# Altium PCB morpheus_pill_bqle_ASSY.PcbDoc (part 2 of 2)
Units mil, origin at the board's own origin, x right, y up, seen from the top; angles counter-clockwise.
Board outline 944.59 x 944.86 mil, 4 copper layers (TOP, COM, SIG, BOT), stack 33.6 mil thick; 116 components, 86 nets, 384 pads, 167 vias.
Unrouted connection lines stored in the file: 4.
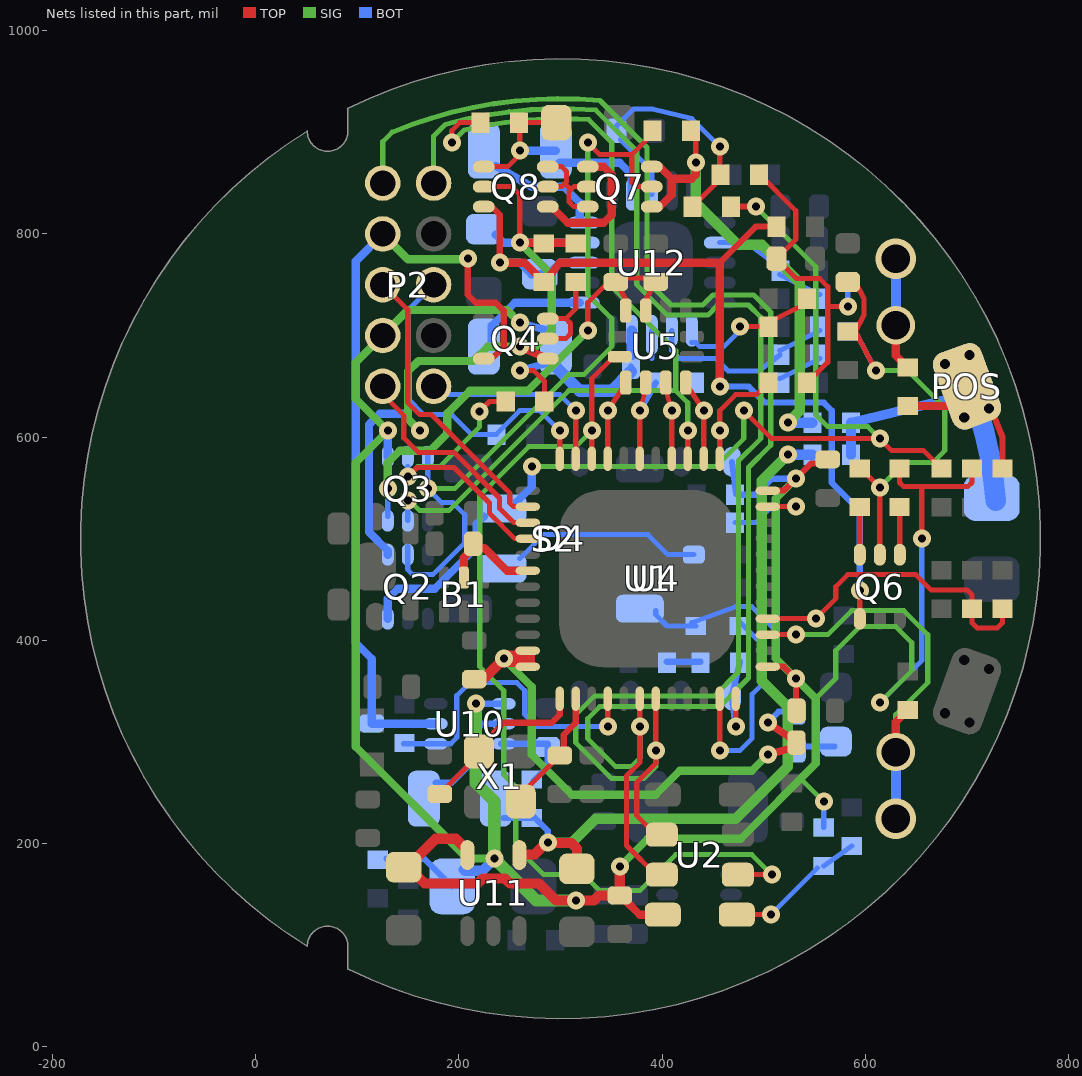
[diagram p4: the nets of this part, all layers, seen from the top]

## Via types
v1: diameter 17.72, hole 7.87, TOP to BOT, 158 vias
v2: diameter 17.72, hole 7.87, TOP to BOT, tented both sides, 5 vias
v3: diameter 22, hole 12, TOP to BOT, 2 vias
v4: diameter 40, hole 28, TOP to BOT, 2 vias

## Nets (pads, with @x,y where several pads share a name; then routed paths per layer and width w, separated by ;. In a path a pad name is that pad's centre, name@x,y a point inside that pad or via, vN(x,y) a via of type N, cw(c..) or ccw(c..) an arc to the next point about the centre after c; other vN are vias at no path point) (continued)
IMU_EN: Q3.5 R18.1 U1.28 | length 302.3
  TOP w5: v2(149.61,561.02) 158.58,570 195.08,570 230,535.08 230,525 255,500 U1.28@267.52,500 ; v1(220,625) 230,635 R18.1@246,635
  SIG w5: v2(149.61,561.02) 159.45,570.87 181.1,570.87 220,609.76 v1(220,625)
  BOT w5: v2(149.61,561.02) Q3.5@149.61,570.87
IMU_MISO: U1.17 U5.3 | length 75.9
  TOP w5: U5.3@401.57,653.54 v1(409.45,625.98) U1.17@409.45,578.74
IMU_MOSI: U1.15 U5.4 | length 75.6
  TOP w5: U5.4@425.2,649.61 v1(440.94,625.98) U1.15@440.94,578.74
IMU_SCLK: U1.21 U5.1 | length 75.6
  TOP w5: U1.21@346.46,578.74 v1(346.46,625.98) U5.1@362.2,649.61
INT: U1.22 U2.2 U5.12 | length 935.2
  TOP w5: U1.22@330.71,578.74 v1(330.71,606.3) 330.71,657.48 U5.12@354.33,681.1 ; U2.2@474.41,169.29 v1(507.87,169.29)
  SIG w5: v1(330.71,606.3) 314.96,590.55 268.7,590.55 220.47,542.32 220.47,374.02 244.09,350.39 244.09,267.72 255.91,255.91 255.91,196.85 283.46,169.29 322.83,169.29 338.58,153.54 377.95,153.54 413.39,188.98 488.19,188.98 v1(507.87,169.29)
LED1: R63.1 U1.11 | length 94
  TOP w5: U1.11@503.74,531.5 v1(531.5,531.5)
  BOT w5: R63.1@471.76,515.75 492.13,515.75 507.87,531.5 v1(531.5,531.5)
LED2: R62.1 U1.47 | length 217.1
  TOP w5: v1(456.69,291.34) U1.47@456.69,342.52
  BOT w5: v1(456.69,291.34) 476.38,291.34 488.6,303.56 488.6,346.87 500,358.27 500,394.39 R62.1@476.38,418.01
LED3: R33.2 R61.1 S1.2 S2.3 U1.3 | length 581.6
  TOP w5: U1.3@503.74,405.51 v1(531.5,405.51)
  TOP w7.99: S1.2@629.92,290 629.92,319.58 R33.2@641.73,331.39
  SIG w5: v1(531.5,405.51) 562.99,405.51 586.61,429.13 637.8,429.13 661.42,405.51 661.42,358.27 629.92,326.77 S1.2@629.92,290
  BOT w5: S2.3@393.7,429.13 393.7,425.2 404.83,414.07 R61.1@433.07,414.07 ; R61.1@429.13,417.32 472.44,433.07 488.19,433.07 515.75,405.51 v1(531.5,405.51)
  BOT w10: v4@630,225 S1.2@630,290
  other v4: 629.92,224.41
MODE: R17.1 U1.40 U10.4 | length 309.2
  TOP w5: v1(346.46,314.96) U1.40@346.46,342.52
  BOT w5: R17.1@145.67,298.19 191.89,298.19 197.83,304.13 197.83,345.47 210.63,358.27 256.89,358.27 264.76,350.39 264.76,326.77 276.57,314.96 v1(346.46,314.96)
NetC37_2: C37.2 Q6.2 R32.2 R37.2 R39.1 | length 449.2
  TOP w5: R32.2@589.11,701.91 598.66,720.35 ; R32.2@589.11,706.16 v1(610.24,665.35) ; C37.2@589.11,754.78 598.66,736.34 598.66,720.59 ; R39.1@594.49,566.24 R39.1@598.43,570.18 ; R39.1@594.49,570.18 v1(614.17,550.5) Q6.2@614.17,488.17
  SIG w5: v1(610.24,665.35) 641.73,665.35 678.15,628.94 678.15,586.61 666.34,574.8 638.48,574.8 v1(614.17,550.5)
  BOT w5: R37.2@589.11,706.16 v1(610.24,665.35)
NetC66_2: C66.2 R66.2 R67.1 R68.2 | length 313.6
  TOP w5: R67.1@495.72,858.61 531.5,822.83 531.5,794.59 C66.2@512.5,775.59 532.18,755.91 555.12,755.91 562.99,748.03 562.99,673.23 ; R66.2@542.62,653.54 562.31,673.23 ; 562.99,728.35 v1(582.68,728.35)
  BOT w5: v1@582.68,729.03 R68.2@582.68,752.65
NetD1_2: D1.2 D4.1 | length 189.2
  BOT w5: D4.1@259.84,480.32 283.46,503.94 385.83,503.94 405.51,484.25 D1.2@431.1,484.25
NetL3_1: L3.1 U12.20 | length 114.2
  BOT w8: L3.1@236.25,866.69 271.65,846.46 303.15,846.46 318.9,830.71 U12.20@318.9,811.02
NetL4_2: L4.2 U12.16 | length 118.3
  BOT w8: L4.2@236.22,688.98 232.28,692.91 232.28,709.65 254.92,732.28 U12.16@318.9,732.28
NetL5_2: L5.2 L6.1 | length 38.3
  BOT w5.98: L5.2@531.5,295.28 L6.1@569.77,295.28
NetL7_1: L7.1 U10.2 | length 104.5
  BOT w6: L7.1@177.17,259.84 192.91,259.84 216.54,283.46 216.54,311.02 223.39,317.87 U10.2@241.5,317.87
NetQ4_5: Q4.5 Q4.6 R21.1 | length 99.2
  TOP w5: Q4.5@287.4,696.85 305.08,696.85 309.84,701.61 309.84,711.77 305.08,716.54 ; Q4.6@287.4,716.54 305.08,716.54 ; R21.1@314.96,752.65 314.96,726.42 305.08,716.54
NetQ6_1: Q6.1 R38.1 | length 42.8
  TOP w5: Q6.1@633.86,488.17 R38.1@633.86,531
NetQ6_3: Q6.3 R39.2 | length 40.1
  TOP w5: Q6.3@594.49,488.17 R39.2@594.49,528.24
NetQ7_1: Q7.1 Q8.4 | length 135.1
  TOP w7.99: Q8.4@291.34,826.77 307.09,811.02 342.52,811.02 350.39,818.9 350.39,858.27 342.52,866.14 Q7.1@326.77,866.14
NetQ7_2: Q7.2 Q7.3 Q8.5 Q8.6 | length 122.4
  TOP w5: Q8.5@287.4,846.46 301.14,846.46 305.91,851.22 305.91,861.38 301.14,866.14 Q8.6@287.4,866.14 ; 305,848 310,844 ; Q7.2@326.77,846.46 313.03,846.46 308.27,841.69 308.27,831.54 313.03,826.77 ; 313.03,826.77 Q7.3@326.77,826.77 313.03,826.77
NetR47_1: R47.1 R48.2 | length 44
  BOT w5: R48.2@515.75,657.48 R47.1@555.12,677.17
NFLASH_CS: R13.1 U1.48 U4.1 | length 93.5
  TOP w5: v1(472.44,314.96) U1.48@472.44,342.52
  BOT w6: U4.1@468.5,346.46 v1(472.44,314.96) ; U4.1@468.7,345.63 R13.1@476.57,378.9
NIMU_CS: R28.1 U1.19 U5.2 | length 107.6
  TOP w5: U1.19@377.95,578.74 v1(377.95,625.98) U5.2@385.83,653.54
  BOT w6: v1(377.95,625.98) R28.1@393.7,653.54
OE: R2.1 R3.2 U2.1 | length 132.1
  TOP w5: U2.1@473.43,129.92 v1(506.89,129.92)
  BOT w5: v1(506.89,129.92) R2.1@552.66,175.69 ; R2.1@559.06,177.85 R3.2@586.61,197.54
OV: R44.1 R45.2 U12.7 | length 110.3
  BOT w5: U12.7@456.69,791.34 483.57,791.34 R45.2@515.06,767.72 ; R45.2@515.75,759.84 R44.1@555.12,740.16
PROG: R41.1 R42.2 U12.11 | length 132.5
  TOP w5: v1(476.38,708.66) R42.2@503.94,708.66 ; R42.2@503.94,712.6 R41.1@543.31,732.28
  BOT w5: U12.11@429.13,692.91 433.07,692.91 437.01,688.98 460.63,688.98 v1@480.32,708.66
RGB_DIS: Q2.5 Q3.6 Q7.5 R20.1 | length 780.6
  TOP w5: v1(326.77,889.76) 338.58,877.95 370.08,877.95 ; Q7.5@389.76,846.46 374.02,846.46 370.08,850.39 370.08,877.95 ; R20.1@394.39,901.57 393.7,901.57 370.08,877.95
  SIG w5: v2(169.29,549.21) 195.87,549.21 308.07,661.42 322.83,661.42 350.39,688.98 350.39,716.54 326.77,740.16 v1(326.77,889.76)
  BOT w5: Q2.5@149.61,492.13 Q2.5@149.61,484.25 149.61,469.49 154.53,464.57 174.21,464.57 205.71,496.06 205.71,523.62 193.9,535.43 183.07,535.43 v2(169.29,549.21) Q3.6@169.29,580.71
RGB_EN: Q3.2 R65.2 U1.16 | length 895.6
  TOP w5: v1(192.91,889.76) 192.91,901.57 200.79,909.45 R65.2@221.16,909.45 ; U1.16@425.2,578.74 v1(425.2,606.3)
  SIG w5: v2@149.61,539.37 161.42,527.56 189.96,527.56 308.07,645.67 413.39,645.67 ; v1(192.91,889.76) 205.54,902.39 ; 205.49,902.44 cw(c300,500) 327.76,912.45 ; 327.73,912.42 350.39,889.76 350.39,748.03 413.39,685.04 413.39,645.67 ; v1(425.2,606.3) 425.2,633.86 413.39,645.67
  BOT w5: Q3.2@149.61,517.72 v2(149.61,537.4)
RXD: P2.5 U1.26 | length 292.5
  TOP w5: P2.5@125,750 149.61,725.39 149.61,633.86 161.42,622.05 172.95,622.05 250,545 250,535 253.5,531.5 U1.26@267.52,531.5
SCL: P2.10 U1.43 U2.6 | length 1371
  TOP w5: U2.6@393.7,208.66 375,227.36 375,260 393.7,278.7 v1(393.7,291.34) U1.43@393.7,342.52
  SIG w5: P2.10@175,850 175,896.15 186.61,907.75 cw(c300,500) 334.69,921.8 375,881.49 375,750 405,720 445,720 455,730 485,730 497.05,717.95 497.05,598.43 475,576.38 475,368.7 451.3,345 333.19,345 314.96,326.77 314.96,299.21 350.39,263.78 381.89,263.78 393.7,275.59 v1(393.7,291.34)
SDA: P2.9 U1.42 U2.7 | length 1455.2
  TOP w5: U1.42@377.95,342.52 377.95,279.53 365,266.57 365,197.99 U2.7@394.69,168.31
  SIG w5: P2.9@125,850 125,890.83 134.29,900.11 cw(c300,500) 338.78,931.33 385,885.11 385,753.58 408.58,730 440,730 450,740 490,740 506.89,723.11 506.89,591.89 485,570 485,362.95 457.05,335 338.58,335 ; 338.58,334.65 326.77,322.83 326.77,303.15 354.33,275.59 369.72,275.59 377.95,283.82 v1(377.95,314.96)
STATUS: U12.13 | length 27.6
  BOT w5: 389.76,677.17 U12.13@389.76,704.72
SW: R34.1 S1.1 | length 111.3
  TOP w7.99: S1.1@629.92,710 629.92,680.42 R34.1@641.73,668.61
  BOT w10: S1.1@630,710 v4@630,775
  other v4: 629.92,775.59
SWDCLK: P2.6 R1.2 U1.24 | length 332.4
  TOP w5: U1.24@299.21,578.74 v1(299.21,606.3)
  BOT w5: P2.6@175,750 150,725 150,637.4 165.35,622.05 192.91,622.05 212.6,602.36 R1.2@236.91,602.36 ; R1.2@236.56,602.7 259.84,625.98 279.53,625.98 v1(299.21,606.3)
SWDIO: P2.2 U1.23 | length 192.1
  TOP w5: U1.23@314.96,578.74 v1@314.96,622.76
  BOT w5: P2.2@175,645.67 178.94,641.73 299.21,641.73 v1(314.96,625.98)
TRIM: R66.1 U1.14 | length 106.6
  TOP w5: U1.14@456.69,578.74 v1(456.69,606.3) 456.69,625.98 472.44,641.73 492.81,641.73 R66.1@504.62,653.54
TXD: P2.1 U1.27 | length 219.3
  TOP w5: P2.1@121.06,646.06 145.67,621.46 145.67,599.33 160,585 195,585 240,540 240,530 254.25,515.75 U1.27@267.52,515.75
VAUX: C23.2 P2.7 Q4.3 U10.5 | length 789.5
  TOP w6: v1(208.66,775.59) 208.66,740.16 216.54,732.28 236.22,732.28 244.09,724.41 244.09,689.09 232.17,677.17 Q4.3@224.41,677.17
  SIG w8: P2.7@125,800 150,775 v1@204.72,775
  BOT w8: 98.43,773.43 98.43,397.64 114.17,381.89 C23.2@114.17,318.21 ; 99.51,774.51 P2.7@125,800 ; C23.2@114.17,317.87 U10.5@178.5,317.87
VBAT: C22.2 POS.1 R23.2 R26.1 R27.1 R34.2 | length 372.3
  TOP w6: POS.1@725,625 735,600 R23.2@735,569
  TOP w7.99: R34.2@641.73,630.61 POS.1@688.98,630.61
  BOT w10: R27.1@585.93,582.68 R26.1@585.93,614.17 POS.1@700.1,641.73 ; POS.1@681.1,645.67 POS.1@685.04,641.73
  BOT w20: POS.1@704.07,647.07 cw(c300,500) C22.2@728.36,537.48
VBYS: Q7.4 Q7.6 R20.2 R26.2 | length 470.9
  TOP w5: v1(433.07,870.08) R20.2@433.07,897.64
  TOP w7.99: Q7.4@389.76,826.77 397.64,826.77 409.45,838.58 409.45,854.33 ; Q7.6@389.76,866.14 397.64,866.14 409.45,854.33 ; v1(433.07,870.08) 433.07,858.27 429.13,854.33 409.45,854.33
  SIG w10: v1(433.07,870.08) 433.07,830.71 474.41,789.37 498.03,789.37 535.43,751.97 535.43,625.98 v1(523.62,614.17)
  BOT w10: v1(523.62,614.17) R26.2@547.93,614.17
VBYT: C63.2 Q6.4 Q8.3 R31.1 R35.2 U12.18 | length 896.6
  TOP w5: Q6.4@594.49,421.26 v1(594.49,448.82)
  TOP w5.98: 456.69,771.65 492.13,807.09 R35.2@512.5,807.09
  TOP w6: Q8.3@232.28,826.77 240.16,818.9 v1(240.16,771.65)
  TOP w7.99: v1(240.16,771.65) 264.46,771.65 R31.1@283.46,752.65 ; R31.1@287.4,755.91 299.21,771.65 452.76,771.65 ; v1(456.69,649.61) 456.69,771.65
  BOT w5.98: v1(456.69,649.61) 485.39,649.61 501.14,633.86 559.06,633.86 566.93,625.98 566.93,555.12 594.49,527.56 v1(594.49,448.82)
  BOT w8: v1(240.16,771.65) 259.84,771.65 271.16,760.34 C63.2@272.15,760.34 ; C63.2@279.53,760.34 287.9,760.34 299.21,771.65 U12.18@323.33,771.65
VDD: C6.2 C13.2 L5.1 U1.35 U1.36 | length 534.4
  TOP w6: U1.35@257.87,389.76 U1.35@267.52,389.76 ; U1.36@271.65,374.02 U1.35@271.65,389.76
  TOP w8: v1(503.94,287.4) C13.2@531.5,295.28 ; v1(503.94,318.9) C13.2@527.56,303.15
  TOP w10: C6.2@223.98,361.77 v1(244.09,381.89)
  TOP w16: v1(244.09,381.89) 264.76,381.89
  SIG w8: v1(244.09,381.89) 271.65,354.33 271.65,287.4 311.02,248.03 393.7,248.03 417.32,271.65 488.19,271.65 v1(503.94,287.4)
  BOT w5.98: v1(503.94,318.9) 514.76,329.72 L5.1@531.5,329.72
VDD_PA: B1.5 C8.2 U1.30 | length 96.9
  TOP w7.99: B1.5@204.72,460.63 204.72,481.47 214,490.75 225,490.75 247.24,468.5 U1.30@267.72,468.5
VER_EN: R22.1 R30.1 U1.4 | length 309.7
  TOP w5: U1.4@503.74,421.26 v1(551.18,421.26) 570.87,440.94 570.87,452.76 582.68,464.57 649.61,464.57 664.47,449.7 700.08,449.7 705,444.78 R30.1@705,431 705,417.22 709.92,412.3 730.08,412.3 735,417.22 R22.1@735,431
VIMU: C19.2 C20.2 Q3.3 R28.2 U5.9 U5.10 | length 452.7
  TOP w5: v1(326.77,704.72) 326.77,732.28 C20.2@346.46,751.97 ; C20.2@354.03,753.99 U5.10@364.31,735.47 ; C20.2@354.33,756.59 C19.2@393.7,756.59 ; U5.9@383.72,735.47 C19.2@394,753.99
  SIG w8: v2(129.92,549.21) 129.92,574.8 141.73,586.61 171.61,586.61 188.43,603.43 188.43,623.43 210.67,645.67 267.72,645.67 v1(326.77,704.72)
  BOT w5: Q3.3@129.92,521.65 v2(129.92,549.21)
VIN: C61.2 L3.2 Q8.1 R65.1 U12.2 | length 231.9
  TOP w5: Q8.1@224.41,866.14 248.03,866.14 v1@263.78,881.89 ; v1(259.84,881.89) R65.1@259.84,909.45 ; 268.21,909.45 C61.2@295.77,909.45
  BOT w8: v1(259.84,881.89) L3.2@295.28,881.89 ; L3.2@299.21,870.08 358.27,870.08 370.08,858.27 U12.2@370.08,838.58
VMCU: C1.2 C2.2 C17.2 C18.2 C21.2 C64.2 L4.1 P2.3 Q3.4 R2.2 R13.2 R14.2 R15.2 R18.2 R29.2 R38.2 R54.2 U1.1 U1.12 U2.8 U4.8 U10.1 U11.5 U12.14 | length 3190.5
  TOP w5: v1(259.84,665.35) 273.58,665.35 284,654.94 R18.2@284,635 ; R38.2@633.58,569 633.58,555.39 637.8,551.18 700.79,551.18 705,555.39 R29.2@705,569 ; v1(655.51,500) 655.51,551.18
  TOP w5.98: U1.12@503.74,547.24 519.68,547.24 v1(531.5,559.06) 546.56,574.12 C1.2@562.31,574.12 ; U1.1@503.94,374.02 519.88,374.02 v1(531.69,362.2) C2.2@531.69,330.71
  TOP w7.99: C21.2@363.86,144.02 377.95,129.92 U2.8@400.59,129.92
  TOP w10: C17.2@153.66,181.42 153.86,181.42 177.17,204.72 196.85,204.72 208.27,193.31 U11.5@208.27,188.66 ; C17.2@157.6,177.48 157.6,169.17 166.02,160.75 218.62,160.75 223.54,165.67 245.2,165.67 250.12,160.75 278.66,160.75 295.39,144.02 332.99,144.02 337.9,148.92 C21.2@358.27,148.92 v1(358.27,177.17)
  SIG w5: 535.93,264.27 v1(559.06,241.14) ; 551.18,342.72 570.87,362.4 570.87,389.76 594.49,413.39 629.92,413.39 645.67,397.64 645.67,370.08 v1(614.17,338.58)
  SIG w8: v1@234.65,185.35 208.35,185.35 98.43,295.28 98.43,574.8 v1(129.92,606.3) 98.43,637.8 98.43,673.43 P2.3@125,700 150,725 247.44,725 v1(259.84,712.6) ; v1(358.27,177.17) 385.83,204.72 477.32,204.72 551.18,278.58 551.18,342.72 v1(531.69,362.2) 511.81,382.09 511.81,539.37 v1(531.5,559.06)
  SIG w12: v1@216.54,329.68 216.54,259.84 234.65,241.73 v1@234.65,185.35 ; v1(235,185) 275.98,144.02 v1(315.08,144.02)
  BOT w5: R2.2@559.06,215.85 v1(559.06,241.14) ; v1(614.17,338.58) 655.51,379.92 v1(655.51,500)
  BOT w5.98: C64.2@369.39,664.67 C64.2@369.39,669.29
  BOT w6: R54.2@128.64,185.41 129.06,185 165.83,185 C18.2@193.03,157.8 ; v1(216.54,337.56) U10.1@241.5,337.56 ; R14.2@404.53,378.94 R13.2@437.69,378.94 ; U4.8@468.7,575.63 R15.2@472.64,544.13 ; R15.2@475.69,543.31 492.13,543.31 507.87,559.06 v1(531.5,559.06)
  BOT w7.99: Q3.4@129.92,580.71 v1(129.92,606.3) ; v1(259.84,665.35) L4.1@287.68,673.23 ; v1(259.84,712.6) L4.1@287.68,704.72
  BOT w10: C18.2@204.49,174.53 205.79,173.23 223.23,173.23 v1(235,185) ; C64.2@370.08,681.1 U12.14@370.08,704.72
  BOT w12: L4.1@295.28,669.29 318.9,645.67 350.39,645.67 C64.2@369.39,664.67
VO: R46.1 R47.2 U12.12 | length 184.1
  BOT w5: U12.12@409.45,704.72 409.45,685.04 417.32,677.17 452.83,677.17 465,665 495,665 R47.2@516.1,681.1 ; R47.2@515.75,685.04 R46.1@555.12,704.72
VREF: C60.2 R60.1 R67.2 U12.3 | length 260.6
  TOP w5: R60.1@429.82,826.77 R67.2@458.06,855.02 ; R67.2@456.69,858.27 v1(456.69,885.83)
  BOT w5: C60.2@355.02,901.57 355.02,906.2 371.93,923.11 390.23,923.11 429.13,913.39 v1(456.69,885.83) ; C60.2@358.95,893.02 389.76,862.2 U12.3@389.76,838.58
VRGB: D4.2 Q2.3 R25.2 R60.2 | length 995
  TOP w5: v1(480.32,625.98) 507.87,598.43 v1(614.17,598.43) 625.98,586.61 657.39,586.61 R25.2@675,569
  TOP w5.98: R60.2@467.82,826.77 v1(492.13,826.77)
  SIG w5: v1(271.65,570.87) 452.76,570.87 480.32,598.43 v1(480.32,625.98) ; v1(492.13,826.77) 551.18,767.72 551.18,622.05 562.99,610.24 602.36,610.24 v1(614.17,598.43)
  BOT w7.99: D4.2@255.91,535.43 271.65,551.18 v1(271.65,570.87)
  BOT w8: Q2.3@129.92,421.26 129.92,440.94 139.76,450.79 176.18,450.79 217.52,492.13 217.52,514.76 D4.2@224.41,521.65
VSTOR: C62.2 Q2.4 Q4.4 Q8.2 R21.2 R31.2 U12.19 | length 778.9
  TOP w5: Q8.2@224.41,846.46 251.97,846.46 259.84,838.58 v1(259.84,791.34)
  TOP w7.99: v1@255.91,791.34 R31.2@283.46,791.34 ; v1(259.84,688.98) Q4.4@287.4,677.17 ; R31.2@287.4,791.34 R21.2@314.96,791.34
  SIG w8: v1(161.42,606.3) 150,617.72 150,665 160,675 214.37,675 228.35,688.98 v1(259.84,688.98) 275.59,688.98 291.34,704.72 291.34,759.84 v1(259.84,791.34)
  BOT w7.99: Q2.4@129.92,484.25 129.92,488.19 111.5,506.61 111.5,612.48 122.05,623.03 144.68,623.03 v1(161.42,606.3)
  BOT w8: C62.2@236.22,799.21 244.09,791.34 U12.19@322.83,791.34
VSYS: C24.2 L7.2 R16.2 R27.2 U11.4 | length 763.3
  TOP w10: U11.4@258.98,189.29 274.72,189.29 286.04,200.61 310.65,200.61 316.06,195.2 C24.2@316.06,175.02
  SIG w10: v1(287.4,200.79) 311.02,200.79 334.65,224.41 472.44,224.41 523.62,275.59 523.62,334.65 498.03,360.24 498.03,557.09 v1(523.62,582.68)
  BOT w6: L7.2@244.09,225.09 R16.2@271.65,225.09 ; R16.2@273.28,226.72 287.4,212.6 v1(287.4,200.79)
  BOT w10: v1(523.62,582.68) R27.2@547.93,582.68
VTPS: C16.2 R16.1 U10.3 | length 88.5
  BOT w6: U10.3@241.5,298.19 287.4,298.19 287.4,275.59 R16.1@273.28,261.47
XC1: C4.2 U1.37 X1.1 | length 143.2
  TOP w5: C4.2@181.1,248.72 X1.1@214.22,281.84
  TOP w6: X1.1@228.35,303.15 244.09,318.9 291.34,318.9 299.21,326.77 U1.37@299.21,342.52
XC2: C5.2 U1.38 X1.3 | length 107.5
  TOP w5: X1.3@266.09,253.59 C5.2@299.21,286.72
  TOP w6: C5.2@303.15,286.72 303.15,307.09 314.96,318.9 U1.38@314.96,342.52
pads on no net: C38.1 C38.2 Q2.1 Q2.2 Q2.6 R4.1 R4.2 R5.2 R6.1 R6.2 R68.1 S2.1 S2.2 S2.4 U2.3 U5.11 U11.3 U12.9 U12.17

## Polygon pours and split planes (outlines as drawn)
GND on COM (split plane): 153 vertices, not listed, extent 74.71,43.56 756.44,956.44

## Other copper
TOP:
  text "1" at 1000,330 h60 r90
SIG:
  text "3" at 1000,500 h60 r90
BOT:
  text "4" at 1000,605 h60 r90
COM (plane layer: these items are gaps in the copper):
  pour cut-out: 66.77,89.14 cw(c300,500) 66.69,910.81 66.93,910.81 66.93,263.78 66.77,263.78 78.74,263.78 cw(c78.74,244.09) 78.74,224.41 66.77,224.41
  lines w7.87: 66.77,224.41 78.74,224.41 ccw(c78.74,244.09) 78.74,263.78 66.77,263.78
  lines w15.75: 66.69,910.81 ccw(c300,500) 66.77,89.14 66.77,224.41 ; 66.93,263.78 66.93,910.81

## Silkscreen, mask and mechanical layers (free items; w line width, h text height)
Top Overlay:
  region: 46.44,470.37 7.12,470.37 cw(c7.12,483.46) -5.97,483.46 -5.97,509.68 cw(c7.13,509.68) 7.13,522.78 33.34,522.78 cw(c33.34,509.68) 46.44,509.68 46.44,470.37 39.79,496.57 cw(c20.24,496.57) 20.24,477.02 20.23,477.02 cw(c20.23,496.57) 0.68,496.57 cw(c20.23,496.57) 20.23,516.13 cw(c20.23,496.57) 39.79,496.57
  region: 20.23,509.67 20.23,483.48 ccw(c20.23,496.57) 33.33,496.57 ccw(c20.23,496.57) 20.23,509.67
  lines w0.39: -5.97,483.46 ccw(c7.13,483.46) 7.13,470.37 46.44,470.37 46.44,496.57 46.44,509.68 ccw(c33.34,509.68) 33.34,522.78 7.13,522.78 ccw(c7.13,509.68) -5.97,509.68 -5.97,483.46 ; 0.68,496.57 ccw(c20.23,496.57) 20.23,477.02 ccw(c20.23,496.57) 39.79,496.57 ccw(c20.23,496.57) 20.23,516.13 ccw(c20.24,496.57) 0.68,496.57 ; 20.23,483.48 ccw(c20.23,496.57) 33.33,496.57 ccw(c20.23,496.57) 20.23,509.67 20.23,483.48
  text "Hello Inc" at 30,550 h27.56 r90
  text "nRF51422" at -90,390 h27.56 r90
  text "905-00007-07" at -30,330 h27.56 r90
  text "(C) 2016" at 30,250 h27.56 r90
Drill Guide:
  lines w6: 1069.88,1907.87 1069.88,1957.87 2119.88,1957.87 2119.88,1907.87 1069.88,1907.87 ; 1071.06,2000 2121.06,2000 2121.06,2050 1071.06,2050 1071.06,2000 ; 1071.06,2400 1071.06,2450 2121.06,2450 2121.06,2400 1071.06,2400 ; 1072.05,2478.74 1072.05,2528.74 2122.05,2528.74 2122.05,2478.74 1072.05,2478.74 ; 1075,2150 2125,2150 2125,2300 1075,2300 1075,2150
Mechanical 1:
  circle w10: c1625,-162 r40
  circle w10: c962,500 r192
  circle w10: c962,500 r1125
  circle w10: c300,1162 r40
  circle w10: c300,1162 r40
  lines w10: 90.71,76.19 90.71,98.68 ccw(c70.71,98.68) 50.71,98.68 cw(c300,500) 50.71,901.32 ccw(c70.71,901.32) 90.71,901.32 90.71,923.81 ; 90.81,923.61 cw(c300,500) 91.23,76.19 ; 595.75,-322.82 cw(c962,-162) 1328.26,-322.8 596.25,-322.8 ; 595.74,1322.8 ccw(c962,1162) 1328.25,1322.82 596.25,1322.82 ; 612.57,1356.68 cw(c962,1162) 1310.98,1357.47 ; 613.02,-357.47 ccw(c962,-162) 1311.43,-356.68 ; 1785.82,133.75 cw(c1625,500) 1785.8,866.26 1785.8,134.25 ; 1819.68,849.43 cw(c1625,500) 1820.47,151.02 ; 2404.53,848.98 ccw(c2600,500) 2405.32,150.57 ; 2439.2,133.74 ccw(c2600,500) 2439.18,866.25 2439.18,134.25
Mechanical 13:
  circle w10: c517.13,503.94 r25
  lines w19.68: -66.56,400.71 47.48,415.58 ccw(c592.13,492.13) 63.43,340.53 -29.08,309.69 ; -66.41,400.74 cw(c292.13,492.13) -77.87,492.74 42.13,492.13 cw(c592.13,492.13) 47.48,568.67 -65.62,586.59 ; -65.62,586.55 cw(c292.13,492.13) -31.88,670.78 ; -31.87,670.77 64.09,646.31 ; -29.23,309.61 ccw(c293.59,490.42) 102.27,173.72 ; 18.94,325.49 ccw(c292.13,492.13) 75.63,256.48 ; 23.18,746.79 92.42,721.92 ; 23.46,746.52 cw(c292.13,492.13) 79.9,795.21 ; 64.17,646.29 cw(c592.13,492.13) 92.39,721.82 ; 75.43,256.71 125.98,302.11
  lines w20: 149.92,180.83 cw(c124.86,149.66) 164.39,155.75 ccw(c300,500) 164.39,844.25 cw(c124.86,850.34) 149.92,819.17 149.92,180.83
Mechanical 15:
  circle w10: c573,710 r10
  circle w10: c573,290 r10
  lines w10: 93.11,303.15 -25,303.15 -25,381.89 93.11,381.89 93.11,460.63 -25,460.63 -25,539.37 93.11,539.37 93.11,618.11 -25,618.11 -25,696.85 93.11,696.85 ; 543,300 543,700 ; 573,250 573,750 ; 603,300 603,700
  lines w40: 100,300 500,300 500,700 100,700 100,300
Drill Drawing:
  drawing of 4541 lines, arcs and shapes, not listed
  text "6" at 3437.44,9733.58 h93.75
  text "5" at 5417.45,9734.12 h93.75
  text "2" at 11339.75,9733.04 h93.75
  text "4" at 7403.05,9732.49 h93.75
  text "8" at -552.16,9728.33 h93.75
  text "1" at 13366.15,9726.9 h93.75
  text "3" at 9371.48,9726.36 h93.75
  text "7" at 1489.74,9725.49 h93.75
  text "D" at 14430.07,8387.83 h93.75
  text "D" at -1632.64,8354.38 h93.75
  text "Layer" at -410.19,7200.63 h60
  text "Name" at -0.28,7200.63 h60
  text "Material" at 929.47,7200.63 h60
  text "Thickness" at 1789.24,7200.63 h60
  text "Constant" at 2439.07,7200.63 h60
  text "Board Layer Stack" at 3008.93,7200.63 h60
  text "1" at -410.19,7080.63 h60
  text "Top Paste" at -0.28,7080.63 h60
  text "2" at -410.19,6960.63 h60
  text "Top Overlay" at -0.28,6960.63 h60
  text "3" at -410.19,6840.63 h60
  text "Top Solder" at -0.28,6840.63 h60
  text "Solder Resist" at 929.47,6840.63 h60
  text "0.010mm" at 1789.24,6840.63 h60
  text "3.5" at 2439.07,6840.63 h60
  text "4" at -410.19,6720.63 h60
  text "TOP" at -0.28,6720.63 h60
  text "Copper" at 929.47,6720.63 h60
  text "0.0177mm" at 1789.24,6720.63 h60
  text "5" at -410.19,6600.63 h60
  text "Dielectric1" at -0.28,6600.63 h60
  text "FR-4" at 929.47,6600.63 h60
  text "0.252mm" at 1789.24,6600.63 h60
  text "4.2" at 2439.07,6600.63 h60
  text "6" at -410.19,6480.63 h60
  text "GND" at -0.28,6480.63 h60
  text "Copper" at 929.47,6480.63 h60
  text "0.0177mm" at 1789.24,6480.63 h60
  text "7" at -410.19,6360.63 h60
  text "Dielectric3" at -0.28,6360.63 h60
  text "FR-4" at 929.47,6360.63 h60
  text "0.130mm" at 1789.24,6360.63 h60
  text "4.2" at 2439.07,6360.63 h60
  text "8" at -410.19,6240.63 h60
  text "SIG" at -0.28,6240.63 h60
  text "Copper" at 929.47,6240.63 h60
  text "0.0177mm" at 1789.24,6240.63 h60
  text "9" at -410.19,6120.63 h60
  text "Dielectric2" at -0.28,6120.63 h60
  text "FR-4" at 929.47,6120.63 h60
  text "0.252mm" at 1789.24,6120.63 h60
  text "4.2" at 2439.07,6120.63 h60
  text "10" at -410.19,6000.63 h60
  text "BOT" at -0.28,6000.63 h60
  text "Copper" at 929.47,6000.63 h60
  text "0.0177mm" at 1789.24,6000.63 h60
  text "11" at -410.19,5880.63 h60
  text "Bottom Solder" at -0.28,5880.63 h60
  text "Solder Resist" at 929.47,5880.63 h60
  text "0.010mm" at 1789.24,5880.63 h60
  text "3.5" at 2439.07,5880.63 h60
  text "C" at -1633.94,5807.18 h93.75
  text "C" at 14409.94,5801.91 h93.75
  text "12" at -410.19,5760.63 h60
  text "Bottom Overlay" at -0.28,5760.63 h60
  text "13" at -410.19,5640.63 h60
  text "Bottom Paste" at -0.28,5640.63 h60
  text "Symbol" at -100.24,4822.48 h72
  text "Hit Count" at 405.64,4822.48 h72
  text "Finished Hole Size" at 1103.45,4822.48 h72
  text "Plated" at 2449.06,4822.48 h72
  text "Hole Type" at 2954.93,4822.48 h72
  text "8" at 405.64,3622.48 h60
  text "0.254mm (10mil)" at 1103.45,3622.48 h60
  text "PTH" at 2449.06,3622.48 h60
  text "Round" at 2954.93,3622.48 h60
  text "Fabrication / Assembly Notes" at 7880.75,3523.03 h60
  text "134" at 405.64,3472.48 h60
  text "0.711mm (28mil)" at 1103.45,3472.48 h60
  text "PTH" at 2449.06,3472.48 h60
  text "Round" at 2954.93,3472.48 h60
  text "1. Material: Rigid FR-4, RoHS compliant: material should meet or exceed requirements of IPC 4101/129" at 7880.75,3404.92 h60
  text "142 Total" at 405.64,3322.48 h60
  text "B" at -1634.85,3290.08 h93.75
  text "2. Number of electrical layers: 4" at 7880.75,3286.81 h60
  text "B" at 14450.24,3275.92 h93.75
  text "3. Trace / Space minimum: 5mil (all layers)" at 7880.75,3168.7 h60
  text "4. Thickness: 0.78mm (finished)" at 7880.75,3050.59 h60
  text "5. Finish:  ENIG plating on exposed copper" at 7880.75,2932.48 h60
  text "6. Soldermask: per IPC-SM-840, color violet registration within +/- 50um of circuit layer" at 7880.75,2814.37 h60
  text "7. Silkscreen: do print silkscreen on top and bottom layers" at 7880.75,2696.26 h60
  text "0.5oz Cu" at 2449.21,2578.19 h100
  text "8. Board must meet or exceed 94V-0" at 7880.75,2578.15 h60
  text "TOP Layer" at 450,2553.74 h60
  text "5 mil PrePreg" at 1417.05,2488.74 h30
  text "9. Board must be lead free process compatible and able to withstand minimum of" at 7880.75,2460.04 h60
  text "5 mil PrePreg" at 1416.06,2410 h30
  text "0.5oz Cu" at 2440,2390 h100
  text "GND Layer" at 450,2350 h60
  text "5 cycles at 250 degrees celsius" at 8057.91,2341.93 h60
  text "10. All Test/QA/QC markings to be made on back side of PCB" at 7880.75,2223.82 h60
  text "_" at 2795,2205 h100
  text "5mil Core" at 1440,2200 h30
  text "+" at 2795,2190 h100
  text "0.028" at 2290,2180 h100
  text "0.5 mils" at 2930,2180 h100
  text "11. x mousebites shall be no larger than 0.05 mm" at 7880.63,2103.27 h60
  text "SIG Layer" at 450,2100 h60
  text "5 mil PrePreg" at 1416.06,2010 h30
  text "0.5oz Cu" at 2450,1980 h100
  text "12. 0.25mm radius around sharp edges like the notch on the right side" at 7880.75,1979.72 h60
  text "5 mil PrePreg" at 1414.88,1917.87 h30
  text "BOT Layer" at 450,1900 h60
  text "0.5oz Cu" at 2461.02,1806.54 h100
  text "2 X" at 200,1500 h125
  text "5.78mm" at 660,1500 h125
  text "_" at 710,1320 h125
  text "+" at 710,1305 h125
  text "0.1mm" at 835,1285 h125
  text "DRAFTER" at 9871.46,1182.36 h39.37
  text "DATE" at 10797.24,1182.36 h39.37
  text "METRIC" at 8934.29,1148.88 h70
  text "Top Side Compenent Designators" at -145,1135 h30
  text "TITLE:" at 11587.13,1097.89 h100
  text "DIMENSIONS ARE IN MILLIMETERS" at 8525.25,961.04 h39.37
  text "DESIGNER" at 9879.69,900.1 h39.37
  text "DATE" at 10797.24,900.1 h39.37
  text "TOLERANCES:" at 8525.25,863.79 h39.37
  text "D Shaffer" at 9996.06,775.59 h70
  text "11/25/14" at 10870.23,771.8 h70
  text "0.05" at 9361.87,757.5 h59.06
  text "0 > - < 2" at 8676.13,753.3 h59.06
  text "A" at 14420.84,669.45 h93.75
  text "2 X" at 1200,660 h125
  text "A" at -1635.24,652.68 h93.75
  text "2 > - < 10" at 8673.3,642.81 h59.06
  text "0.08" at 9361.87,642.81 h59.06
  text "10 > - < 50" at 8629.66,523.76 h59.06
  text "0.10" at 9361.87,523.76 h59.06
  text "PROPRIETARY AND CONFIDENTIAL" at 9860.93,504.47 h59.06
  text "10.2mm" at 1200,480 h125
  text "50 > - < 100" at 8632.55,406.77 h59.06
  text "0.15" at 9361.87,406.77 h59.06
  text "Pill Motion Sensor" at 11866.14,401.57 h118.11
  text "_" at 1145,340 h125
  text "+" at 1145,325 h125
  text "THE INFORMATION CONTAINED IN" at 9970.29,308.01 h49.21
  text "100 > - < 200" at 8588.91,285.58 h59.06
  text "0.20" at 9361.87,285.58 h59.06
  text "THIS DRAWING IS THE SOLE" at 9970.29,199.74 h49.21
  text "200 > -" at 8588.91,149.97 h59.06
  text "0.20" at 9361.87,149.97 h59.06
  text "2 X" at -790.87,106.46 h125
  text "PROPERTY OF HELLO INC." at 9970.29,91.47 h49.21
  text "ANGLES" at 8675.73,-29.71 h59.06
  text "1.00" at 9361.87,-30.61 h59.06
  text "R0.40mm" at -911.88,-91.18 h125
  text "SIZE" at 11579.71,-101.45 h78.74
  text "DWG.  NO." at 12005.43,-102.9 h78.74
  text "REV" at 13855.51,-106.75 h78.74
  text "ANY REPRODUCTION IN PART OR" at 9970.29,-125.06 h49.21
  text "AS A WHOLEWITHOUT THE" at 9970.29,-233.33 h49.21
  text "0.10mm" at -794.41,-324.57 h125
  text "+" at -919.41,-329.57 h125
  text "WRITTEN PERMISSION OF HELLO" at 9970.29,-341.6 h49.21
  text "24.0mm dia" at 500,-380 h125
  text "B" at 11629.45,-416.88 h250
  text "_" at -919.41,-444.57 h125
  text "INC IS PROHIBITED." at 9970.29,-449.87 h49.21
  text "0.00mm" at -794.41,-524.57 h125
  text "_" at 445,-540 h125
  text "+" at 445,-555 h125
  text "0.1mm" at 580,-580 h125
  text "SHEET 1 OF 1" at 13384.88,-636.29 h78.74
  text "SCALE: 2:1" at 11586.36,-636.62 h78.74
  text "WEIGHT:" at 12448.35,-640.3 h78.74
  text "4" at 7332.13,-782.47 h93.75
  text "8" at -534.48,-790.21 h93.75
  text "7" at 1496.18,-789.91 h93.75
  text "6" at 3457.58,-789.52 h93.75
  text "5" at 5423.87,-792.59 h93.75
  text "1" at 13347.07,-801.8 h93.75

## Text inside footprints (layer, text, board x,y; h text height)
D4: Mechanical 15 "R" at 319.68,492.13 h15.75; Mechanical 15 "G" at 291.03,507.87 h15.75; Mechanical 15 "B" at 291.03,476.38 h15.75